# EAGLE board Lab PSU (EAGLE 6.5.0)
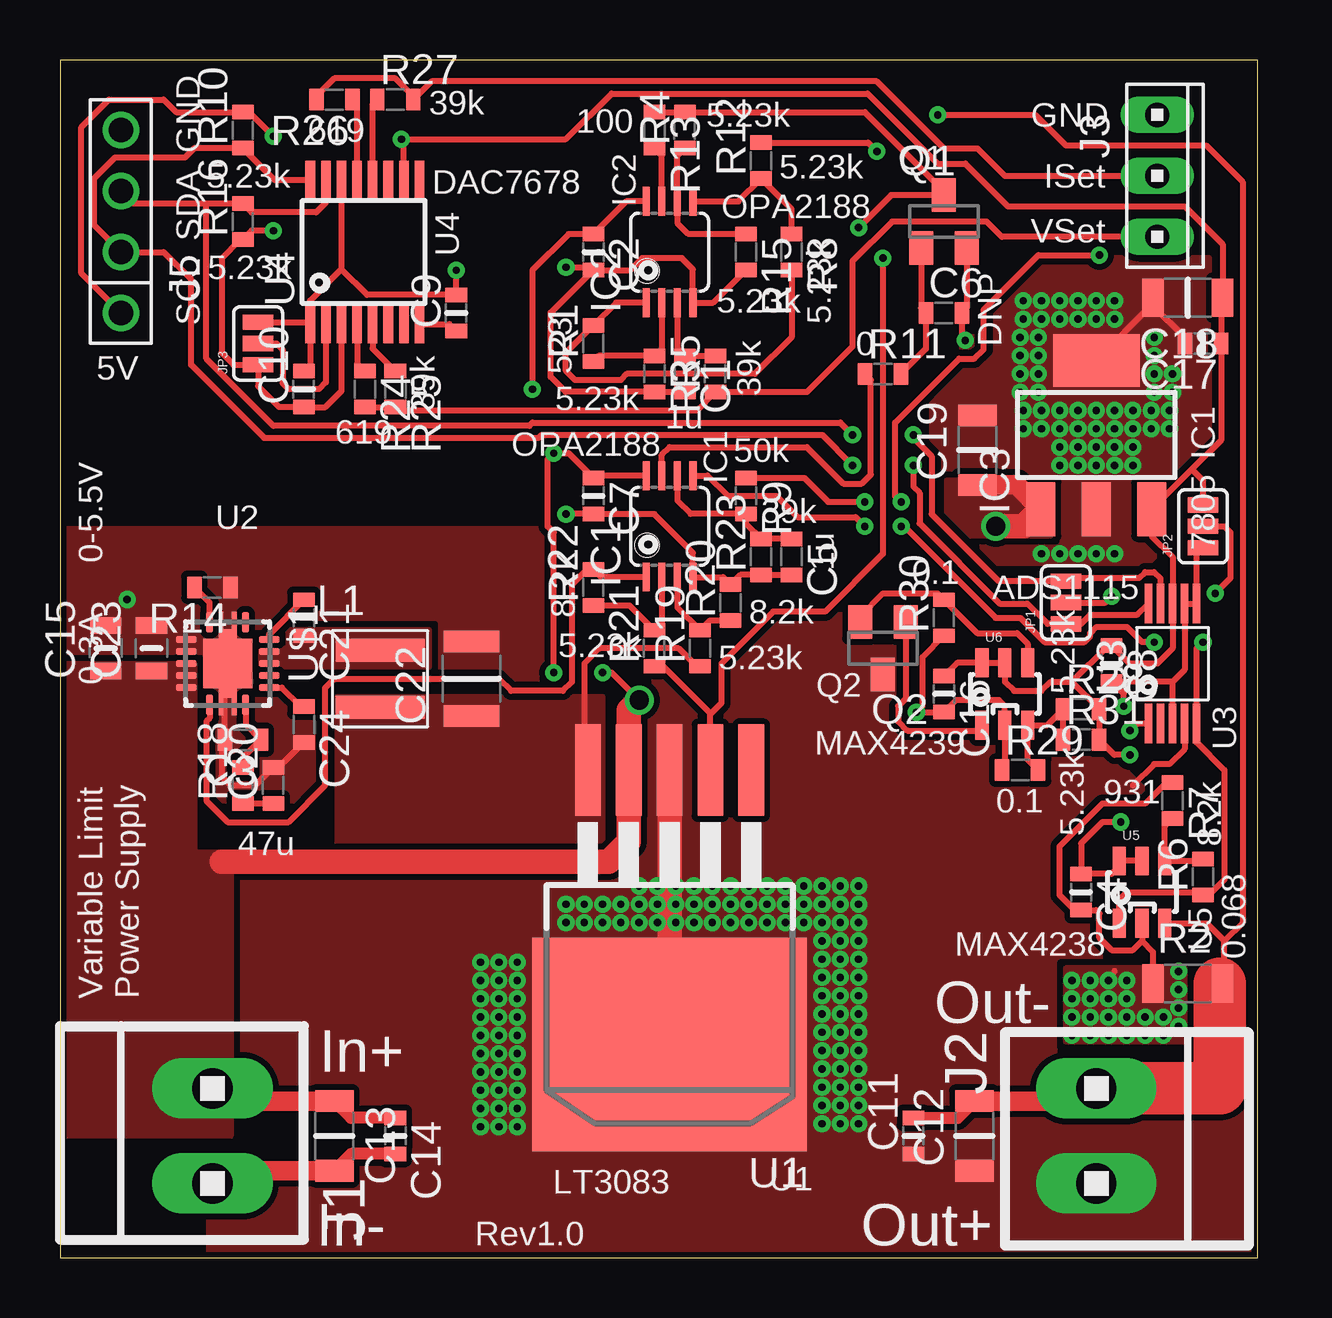
[diagram p0: board, top side]
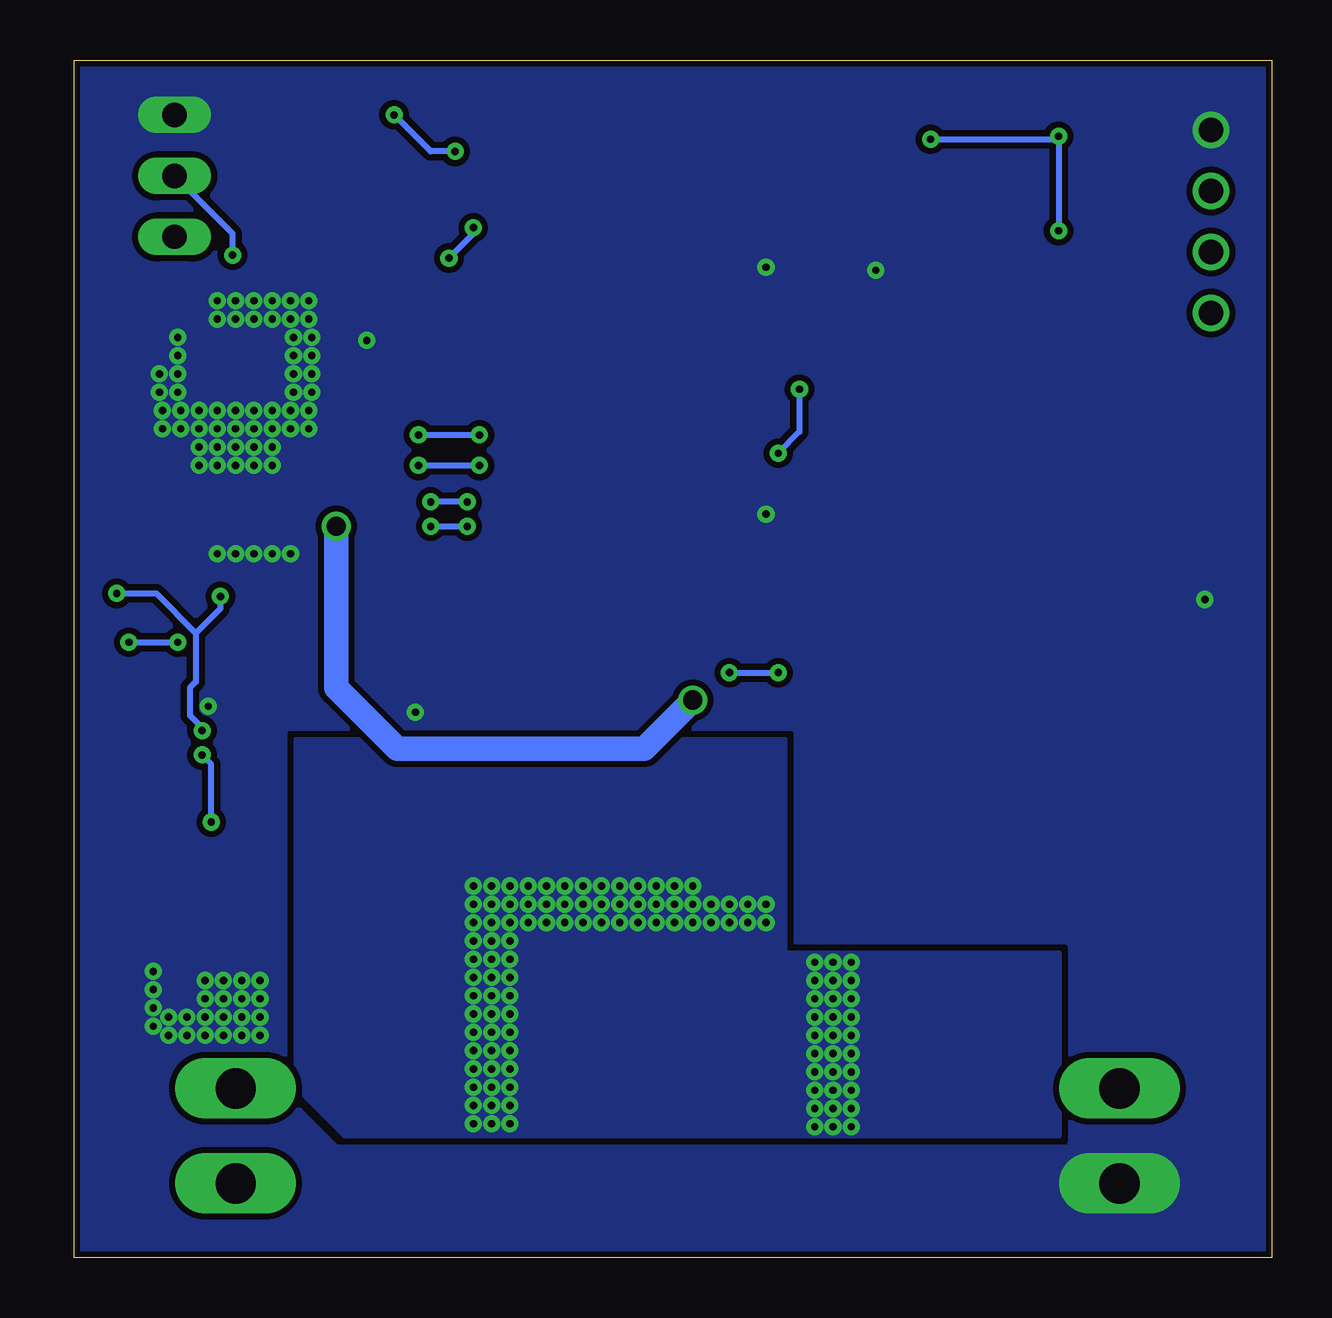
[diagram p1: board, bottom side, seen from below]

Size 49.91 x 49.91 mm. Coordinates in mm from the lower left corner, seen from the top.
Outline: 0,0 49.91,0 49.91,49.91 0,49.91 0,0
Copper layers (1*16): Top 0.035mm / dielectric 1.5mm / Bottom 0.035mm
Design rules "default *": minimum track width 10mil, minimum drill 12mil, track to track 8mil, track to pad 8mil, pad to pad 8mil, via to via 8mil, smd to smd 8mil, copper to edge 10mil, drill to drill 8mil, minimum pad ring 10mil, minimum via ring 8mil, stop-mask expansion 2mil, vias tented up to drill 13mil, thermal gap 10mil
tRestrict: 4 lines

## Footprints (pad centres in the part's own frame; a part is rotated, then mirrored left to right if it is on the bottom)
C0603 = smd 0.6 x 0.9: 1 -0.75,0; 2 0.75,0
C1206 = smd 0.9 x 1.6: 1 -1.45,0; 2 1.45,0
C0805 = smd 0.7 x 1.3: 1 -0.95,0; 2 0.95,0
C1210 = smd 0.9 x 2.3: 1 -1.55,0; 2 1.55,0
MSOP08 = smd 0.3 x 1.2: 1 -0.976,-2.113; 2 -0.326,-2.113; 3 0.324,-2.113; 4 0.974,-2.113; 5 0.974,2.112; 6 0.324,2.112; 7 -0.326,2.112; 8 -0.976,2.112
SOT223 = smd 1.219 x 2.235: 1 -2.311,-3.099; 2 0,-3.099; 3 2.311,-3.099 | smd 3.6 x 2.2: 4 0,3.099
1X2MTA = drill 1.676 long: 1 1.981,0; 2 -1.981,0
10X03MTA = drill 1.016 long: 1 2.54,0; 2 0,0; 3 -2.54,0
10X04MTA = drill 1.016: 1 -3.81,0; 2 -1.27,0; 3 1.27,0; 4 3.81,0
SJ_3 = smd 0.635 x 1.27: 1 -0.889,0; 2 0,0; 3 0.889,0
XAL4000 = smd 3.708 x 0.965: P$1 0,1.181; P$2 0,-1.181
SOT23 = smd 1 x 1.4: 1 -0.95,-1.1; 2 0.95,-1.1; 3 0,1.1
D2PAK-5 = smd 1.067 x 3.81: 1 -3.404,-7.62; 2 -1.702,-7.62; 3 0,-7.62; 4 1.702,-7.62; 5 3.404,-7.62 | smd 11.43 x 8.89: PAD 0,3.81
S-PDSO-G10 = smd 0.296 x 1.65: P$1 -1,-2.5; P$2 -0.5,-2.5; P$3 0,-2.5; P$4 0.5,-2.5; P$5 1,-2.5; P$6 1,2.5; P$7 0.5,2.5; P$8 0,2.5; P$9 -0.5,2.5; P$10 -1,2.5
R-PDSO-G16 = smd 0.4 x 1.6: 1 -2.275,-3; 2 -1.625,-3; 3 -0.975,-3; 4 -0.325,-3; 5 0.325,-3; 6 0.975,-3; 7 1.625,-3; 8 2.275,-3; 9 1.625,3; 10 2.275,3; 11 0.975,3; 12 0.325,3; 13 -0.325,3; 14 -0.975,3; 15 -1.625,3; 16 -2.275,3
SOT23-6 = smd 0.55 x 1.2: 1 -0.95,-1.3; 2 0,-1.3; 3 0.95,-1.3; 4 0.95,1.3; 5 0,1.3; 6 -0.95,1.3
S-PVQFN-N14 = smd 0.85 x 0.28: 1 -1.725,-0.75; 7 1.725,-0.75; 8 1.725,0.75; 14 -1.725,0.75 | smd 0.28 x 0.85: 2 -1,-1.725; 3 -0.5,-1.725; 4 0,-1.725; 5 0.5,-1.725; 6 1,-1.725; 9 1,1.725; 10 0.5,1.725; 11 0,1.725; 12 -0.5,1.725; 13 -1,1.725 | smd 2.05 x 2.05: PP 0,0 | smd 4.3 x 0.2: PP@1 0,0.275; PP@2 0,-0.275 | smd 2.85 x 0.75: PP@3 0,0

## Placement (x,y rotation side)
C1  1u  [C0603]  26.04,36.83 270 top
C2  0.1u  [C0603]  22.23,41.91 270 top
C3  2.69n  [C0603]  7.62,21.59 180 top
C4  0.1u  [C0603]  42.55,15.24 270 top
C5  1u  [C0603]  30.48,29.21 270 top
C6  0  [C0603]  36.83,39.37 0 top
C7  0.1u  [C0603]  22.23,31.75 270 top
C8  0.1u  [C0603]  43.81,24.77 270 top
C9  0.1u  [C0603]  16.51,39.37 90 top
C10  0.1u  [C0603]  10.16,36.2 90 top
C11  1u  [C0603]  35.56,5.08 90 top
C12  10u  [C1206]  38.1,5.08 90 top
C13  10u  [C1206]  11.43,5.08 270 top
C14  1u  [C0603]  13.97,5.08 270 top
C15  4.7u  [C0805]  1.91,25.4 90 top
C16  0.1u  [C0603]  36.83,23.5 270 top
C17  1u  [C0603]  47.62,38.1 180 top
C18  10u  [C1206]  46.99,40.01 180 top
C19  10u  [C1206]  38.23,33.66 90 top
C20  26.5n  [C0603]  8.89,19.68 90 top
C21  0.1u  [C0603]  10.16,26.67 270 top
C22  47u  [C1210]  17.14,24.13 90 top
C23  4.7u  [C0805]  3.81,25.4 90 top
C24  26.5n  [C0603]  10.16,22.23 270 top
IC1  OPA2333DGK  [MSOP08]  25.4,30.48 0 top
IC2  OPA2333DGK  [MSOP08]  25.4,41.91 0 top
IC3  [SOT223]  43.18,34.29 0 top
J1  [1X2MTA]  6.35,5.08 90 top
J2  [1X2MTA]  43.18,5.08 270 top
J3  [10X03MTA]  45.72,45.09 270 top
J5  [10X04MTA]  2.54,43.18 90 top
JP1  JUMPER-3SMD  [SJ_3]  41.91,27.3 90 top
JP2  JUMPER-3SMD  [SJ_3]  47.62,30.48 90 top
JP3  JUMPER-3SMD  [SJ_3]  8.26,38.1 90 top
L1  8.2u  [XAL4000]  13.34,24.13 0 top
Q1  BSS123  [SOT23]  36.83,43.18 0 top
Q2  BSS123  [SOT23]  34.29,25.4 180 top
R1  523  [C0603]  22.23,38.1 90 top
R2  8.3m  [C1206]  46.99,11.43 0 top
R3  5.23k  [C0603]  24.77,36.83 270 top
R4  5.23k  [C0603]  26.04,46.99 90 top
R5  39k  [C0603]  27.3,36.83 90 top
R6  52.3k  [C0603]  47.62,15.88 90 top
R7  659  [C0603]  46.35,19.05 270 top
R8  5.23k  [C0603]  30.48,41.91 270 top
R9  50k  [C0603]  28.57,31.75 270 top
R10  5.23k  [C0603]  7.62,46.99 90 top
R11  0  [C0603]  34.29,36.83 0 top
R12  5.23k  [C0603]  29.21,45.72 90 top
R13  100  [C0603]  24.77,46.99 270 top
R14  200k  [C0603]  6.35,27.94 180 top
R15  5.23k  [C0603]  28.57,41.91 270 top
R16  5.23k  [C0603]  7.62,43.18 90 top
R18  473.25  [C0603]  7.62,19.68 90 top
R19  5.23k  [C0603]  26.67,25.4 90 top
R20  8.2k  [C0603]  27.94,27.3 90 top
R21  5.23k  [C0603]  24.77,25.4 90 top
R22  8.2k  [C0603]  22.23,27.94 90 top
R23  39k  [C0603]  29.21,29.21 90 top
R24  619  [C0603]  12.7,36.2 270 top
R25  39k  [C0603]  13.97,36.2 270 top
R26  619  [C0603]  11.43,48.26 180 top
R27  39k  [C0603]  13.97,48.26 0 top
R28  5.23k  [C0603]  42.55,22.86 0 top
R29  0.1  [C0603]  40.01,20.32 0 top
R30  0.1  [C0603]  36.83,26.67 90 top
R31  5.23k  [C0603]  42.55,21.59 0 top
U1  LT3083-Q  [D2PAK-5]  25.4,12.7 180 top
U3  ADS1115  [S-PDSO-G10]  46.35,24.77 0 top
U4  DAC7678  [R-PDSO-G16]  12.7,41.91 0 top
U5  MAX4238  [SOT23-6]  45.09,15.24 0 top
U6  MAX4238  [SOT23-6]  39.37,23.5 0 top
U$1  TPS54320  [S-PVQFN-N14]  6.99,24.77 270 top

## Library data of the parts
C1-C24 IC3 L1 R1-R16 R18-R31 U1 U3-U6 U$1 = GT-IEEE
IC1 IC2 = linear
J1-J3 J5 = con-amp
JP1-JP3 = SparkFun
Q1 Q2 = transistor-small-signal

## Nets
+5V: C4.1 C8.1 C10.1 C16.1 C17.1 C18.1 IC3.3 J5.1 JP2.3 JP3.1 R10.2 R16.1 R28.2 R31.2 U3.P$8 U4.3 U4.9 U5.5 U5.6 U6.5 U6.6
+12V: C2.1 C7.1 C13.1 C14.1 C15.1 C19.1 C23.1 IC1.8 IC2.8 IC3.1 J1.1 U1.4 U$1.4 U$1.5 U$1.6
GND: C1.2 C2.2 C3.2 C4.2 C5.2 C6.2 C7.2 C8.2 C9.2 C10.2 C13.2 C14.2 C15.2 C16.2 C17.2 C18.2 C19.2 C20.2 C22.2 C23.2 C24.2 IC1.4 IC2.4 IC3.2 IC3.4 J1.2 J3.3 J5.4 JP2.1 JP3.3 Q1.2 R2.1 R3.2 R7.1 R14.1 R15.2 R20.2 R23.1 R29.1 R30.1 U3.P$3 U3.P$6 U3.P$7 U4.1 U4.14 U5.2 U6.2 U$1.2 U$1.3 U$1.PP U$1.PP@1 U$1.PP@2 U$1.PP@3
N$1: C11.1 C12.1 J2.1 Q2.3 U1.3 U1.PAD U3.P$4
N$2: C11.2 C12.2 J2.2 R2.2 R12.2 U5.3
N$3: C1.1 IC2.3 R5.2
N$4: R6.2 R7.2 U5.4
N$5: IC1.5 R6.1 U3.P$5 U5.1
N$6: C5.1 IC1.6 R9.2 R23.2
N$7: IC1.7 R11.1
N$8: Q1.3 R4.2 R13.1 R21.1 U1.2
N$9: IC2.2 R1.1 R3.1
N$10: IC2.7 R13.2
N$11: IC2.1 R1.2 R8.2
N$12: C6.1 Q1.1 R11.2
N$13: IC2.5 R8.1 R12.1
N$14: IC2.6 R4.1 R15.1
N$15: C20.1 R18.1
N$16: J3.1 R5.1 R24.2 R25.2
N$17: J3.2 R9.1 R26.2 R27.2
N$18: C3.1 R18.2 U$1.8
N$19: R14.2 U$1.1
N$20: C22.1 L1.P$2 R19.1 U1.5
N$21: IC1.1 R22.2 U$1.7
N$22: IC1.3 R19.2 R20.1
N$23: IC1.2 R21.2 R22.1
N$24: R24.1 U4.4
N$25: R25.1 U4.5
N$26: C9.1 U4.8
N$27: R26.1 U4.13
N$28: Q2.1 U6.1
N$29: R27.1 U4.12
N$30: R28.1 R29.2 R31.1 U6.3
N$31: Q2.2 R30.2 U6.4
N$32: C21.1 U$1.13
N$33: C21.2 L1.P$1 U$1.11 U$1.12
N$34: C24.1 U$1.9
N$35: JP1.2 JP2.2 U3.P$1
N$36: JP3.2 U4.2
SCL: J5.2 JP1.1 R10.1 U3.P$10 U4.16
SDA: J5.3 JP1.3 R16.2 U3.P$9 U4.15

## Tracks (layer width: path | path; a pad name or v marks a point on that pad's centre or on a via)
+5V  (via drill 0.3)
  Top 0.254: v8.89,46.74 7.89,47.74 R10.2 4.84,47.74 4.32,48.26 2.03,48.26 0.89,47.12 0.89,41.02 J5.1 | v8.89,42.8 7.99,42.8 R16.1 7.49,42.42 6.73,41.66 6.73,37.72 7.24,37.21 JP3.1 8.26,36.32 9.13,35.45 C10.1 11.06,35.45 11.18,35.56 11.72,36.11 U4.3 | U4.9 14.32,46.51 v14.22,46.61 21.08,46.61 22.99,48.51 33.66,48.51 36.58,45.59 37.72,45.59 39.5,43.81 46.86,43.81 48.44,42.24 C18.1 48.38,39.94 C17.1 48.38,34.08 47.16,32.85 | v44.2,18.16 43.43,18.16 42.55,17.27 C4.1 42.56,16 43.81,16 44.13,16.32 U5.6 U5.5 | 47.16,32.85 IC3.3 45.49,30.07 46.35,29.21 U3.P$8 46.35,25.4 45.72,24.77 44.56,24.77 C8.1 43.68,25.52 42.16,24 | C16.1 37.38,24.8 U6.6 U6.5 39.37,24 39.75,23.62 40.89,23.62 41.27,24 42.16,24 | 42.16,24 43.3,22.87 R28.2 R31.2 43.93,20.95 v44.58,20.95 | JP2.3 47.62,32.38 47.16,32.85
  Bottom 0.254: v8.89,42.8 v8.89,46.74 9.02,46.61 v14.22,46.61 | v44.2,18.16 44.2,20.57 v44.58,20.95
+12V  (via drill 0.3, 0.8)
  Top 0.254: IC1.8 22.32,32.59 C7.1 | IC2.8 23.59,44.02 C2.1 21.2,42.66 19.68,41.15 v19.68,36.2 | 22.21,32.51 C7.1 | v20.57,24.38 20.57,30.23 20.32,30.48 20.32,33.27 v20.57,33.53 21.2,33.53 C7.1 | v22.61,24.38 22.99,24.38 v24.13,23.24
  Top 0.508: C14.1 12.13,5.83 C13.1
  Top 0.813: C13.1 6.88,6.53 J1.1 | C19.1 39.85,32.2 IC3.1
  Top 1.016: v24.13,23.24 23.7,22.81 U1.4 23.7,17.35 22.86,16.51 6.73,16.51 | IC3.1 40.16,30.48 v38.99,30.48
  Bottom 0.254: v20.57,33.53 19.68,34.42 v19.68,36.2 | v22.61,24.38 v20.57,24.38
  Bottom 1.016: v38.99,30.48 38.99,23.75 36.45,21.21 26.16,21.21 v24.13,23.24
  pour Top (no thermals): 0,24.77 5.59,24.77 5.59,16.89 7.11,16.89 7.11,5.08 0,5.08
  pour Top (isolate 0.254, no thermals): 36.96,32.38 36.96,30.1 41.27,30.1 41.27,32.13 39.75,32.13 39.75,32.38
GND  (via drill 0.3)
  Top 0.254: C1.2 R3.2 21.07,36.08 20.45,36.7 20.45,39.38 C2.2 | C10.2 10.43,37.21 U4.1 10.43,38.99 | U4.14 11.72,41.19 | 11.72,41.19 12.79,40.12 C9.2 v16.51,41.15 | R15.2 27.21,39.8 IC2.4 26.37,41.19 25.91,41.66 24.26,41.66 23.76,41.16 C2.2 | Q1.2 37.78,39.57 C6.2 37.58,38.37 v37.72,38.23 | C2.2 22.11,41.27 v21.08,41.27 | v21.08,30.99 21.09,31 C7.2 22.24,30.99 24.77,30.99 26.37,29.38 IC1.4 27.63,28.37 R20.2 28.34,28.46 R23.1 C5.2 | 43.93,11.95 43.94,11.94 | U5.2 45.09,13.21 | R7.1 46.09,19.8 45.21,18.92 43.43,18.92 41.66,17.14 41.66,15.11 42.28,14.49 C4.2 43.17,14.49 43.31,14.35 43.31,13.34 43.81,12.83 44.7,12.83 45.09,13.21 | 45.09,13.21 45.54,12.75 R2.1 | 45.54,39.75 C18.2 45.54,39.75 | 45.54,39.75 45.54,39.68 | 45.54,39.68 46.88,38.34 C17.2 | IC3.4 45.54,39.75 | 45.54,39.75 45.54,39.68 | 45.54,39.68 45.54,39.75 | R29.1 39.37,20.43 U6.2 39.37,22.99 39.12,23.24 37.33,23.24 C16.2 36.82,22.73 v35.69,22.73 35.94,22.99 35.94,25.03 R30.1 | v44.32,22.99 44.32,23.51 C8.2 43.83,24 46.35,24 | C24.2 9.12,20.43 C20.2 8.88,20.43 8.13,19.68 7.11,19.68 6.73,20.07 6.73,21.45 C3.2 6.87,24.65 U$1.PP@3 | 10.43,38.99 10.43,39.89 11.72,41.19 | JP3.3 10.43,38.99 | U3.P$3 46.35,24 | 46.35,24 46.85,24.5 U3.P$7 U3.P$6 47.35,29.32 JP2.1
  Top 0.508: C14.2 12.13,4.33 C13.2
  Top 0.813: C13.2 6.88,3.63 J1.2
  other vias: 46.61,11.94 46.61,11.18 46.61,10.41 46.61,9.65 45.97,10.03 45.97,9.27 45.21,9.27 45.21,10.03 44.45,10.79 44.45,11.56 43.69,11.56 43.69,10.79 44.45,10.03 44.45,9.27 43.69,9.27 43.69,10.03 42.93,10.03 42.93,9.27 42.16,9.27 42.16,10.03 42.16,10.79 42.93,10.79 42.93,11.56 42.16,11.56 40.89,39.12 40.77,38.35 40.77,37.59 40.77,36.83 40.77,36.07 41.66,39.12 42.42,39.12 43.18,39.12 43.94,39.12 45.59,38.35 45.59,37.59 45.59,36.83 45.59,36.07 45.47,35.31 44.7,35.31 43.94,34.54 43.94,35.31 43.18,35.31 42.42,35.31 41.66,35.31 40.89,35.31 44.7,34.54 45.47,34.54 46.23,34.54 46.23,35.31 46.35,36.07 46.35,36.83 43.18,34.54 42.42,34.54 41.66,34.54 40.89,34.54 40.13,35.31 40.13,34.54 40.01,36.07 40.01,36.83 40.01,37.59 40.01,38.35 40.13,39.12 40.13,39.88 40.89,39.88 41.66,39.88 42.42,39.88 43.18,39.88 43.94,39.88 43.18,29.34 42.42,29.34 43.94,29.34 43.18,33.02 42.42,33.02 43.94,33.02 41.66,29.34 41.66,33.02 44.7,33.02 43.18,33.78 43.94,33.78 44.7,33.78 42.42,33.78 41.66,33.78 40.89,29.34 2.79,27.43
  pour Top (isolate 0.254, no thermals): 46.86,12.06 41.91,12.06 41.91,9.02 46.86,9.02
  pour Bottom (isolate 0.254, rank 2, no thermals): 0,0 50,0 50,50 0,50
  pour Top (isolate 0.254, rank 2, no thermals): 41.27,41.66 36.32,36.7 36.32,31.5 38.99,28.96 45.34,28.96 47.88,31.5 47.88,41.66
  pour Top (isolate 0.254, rank 2, no thermals): 0,18.29 20.19,18.29 20.19,30.35 0,30.35
N$1  (via drill 0.3)
  Top 0.254: 44.7,19.68 45.59,20.57 46.23,20.57 46.85,21.2 U3.P$4
  Top 1.016: U1.3 25.4,12.06
  other vias: 19.05,12.32 19.05,11.56 19.05,10.79 19.05,10.03 19.05,9.27 19.05,7.75 19.05,8.51 19.05,6.99 19.05,6.22 19.05,5.46 18.29,5.46 18.29,6.22 18.29,6.99 18.29,7.75 18.29,8.51 18.29,9.27 18.29,10.03 18.29,10.79 18.29,11.56 18.29,12.32 31.75,5.59 32.51,5.59 32.51,6.35 31.75,6.35 31.75,7.11 32.51,7.11 32.51,7.87 31.75,7.87 31.75,8.64 32.51,8.64 32.51,9.4 31.75,9.4 31.75,10.16 32.51,10.16 32.51,10.92 31.75,10.92 31.75,11.68 32.51,11.68 32.51,12.45 31.75,12.45 31.75,13.21 32.51,13.21 17.53,5.46 17.53,6.22 17.53,6.99 17.53,7.75 17.53,8.51 17.53,9.27 17.53,10.03 17.53,10.79 17.53,11.56 17.53,12.32 33.27,13.21 33.27,12.45 33.27,11.68 33.27,10.92 33.27,10.16 33.27,9.4 33.27,8.64 33.27,7.87 33.27,7.11 33.27,6.35 33.27,5.59 31.75,13.97 32.51,13.97 33.27,13.97 30.99,13.97 30.23,13.97 29.46,13.97 28.7,13.97 27.94,13.97 27.18,13.97 26.42,13.97 25.65,13.97 24.89,13.97 24.13,13.97 23.37,13.97 22.61,13.97 21.84,13.97 21.08,13.97 21.08,14.73 21.84,14.73 22.61,14.73 23.37,14.73 24.13,14.73 24.89,14.73 25.65,14.73 26.42,14.73 27.18,14.73 27.94,14.73 28.7,14.73 29.46,14.73 30.23,14.73 30.99,14.73 31.75,14.73 32.51,14.73 33.27,14.73 24.13,15.49 24.89,15.49 25.65,15.49 26.42,15.49 27.18,15.49 27.94,15.49 28.7,15.49 29.46,15.49 30.23,15.49 30.99,15.49 31.75,15.49 32.51,15.49 33.27,15.49
  pour Top (isolate 0.254, rank 5, no thermals): 6.22,27.81 36.96,27.81 49.91,14.73 49.91,0 6.22,0
  pour Bottom (isolate 0.254, no thermals): 8.89,5.08 38.61,5.08 40.64,7.11 40.64,21.59 20.32,21.59 20.32,12.7 8.89,12.7
N$2  (via drill 0.3)
  Top 0.254: 48.31,11.43 R2.2 48.51,11.5 48.51,13.21 | v36.58,47.62 40.64,47.62 41.91,46.35 47.75,46.35 49.28,44.83 49.28,13.97 48.51,13.21 | R12.2 33.67,46.47 v34.04,46.1 | U5.3 47.78,13.94 48.51,13.21
  Top 0.508: C11.2 37.4,5.83 C12.2
  Top 0.813: C12.2 43.92,6.53 J2.2
  Top 2.184: 48.31,11.43 48.31,7.06 J2.2
  Bottom 0.254: v34.04,46.1 35.05,46.1 v36.58,47.62
N$3
  Top 0.254: IC2.3 25.72,37.89 C1.1 R5.2
N$4
  Top 0.254: R6.2 47.54,16.54 U5.4 46.03,17.98 R7.2
N$5  (via drill 0.3)
  Top 0.254: IC1.5 26.97,32.59 27.81,31.75 29.84,31.75 30.73,30.86 33.15,30.86 v33.53,30.48 | U5.1 44.13,14.93 44.45,15.24 47.51,15.24 R6.1 47.88,15.12 48.51,15.76 48.51,20.32 47.35,21.48 U3.P$5 47.35,25.38 v47.62,25.65 | v45.59,25.65 45.09,25.65 44.45,26.29 43.18,26.29 42.93,26.04 42.93,25.91 42.67,25.65 41.02,25.65 40.01,26.67 38.99,26.67 35.18,30.48 v35.05,30.48
  Bottom 0.254: v47.62,25.65 v45.59,25.65 | v35.05,30.48 v33.53,30.48
N$6
  Top 0.254: C5.1 R23.2 28.57,30.59 R9.2 26.28,31 25.72,31.55 IC1.6
N$7
  Top 0.254: IC1.7 25.07,33.46 25.4,33.78 31.11,33.78 32.64,32.26 33.4,32.26 33.78,32.64 33.78,36.59 R11.1
N$8  (via drill 0.3)
  Top 0.254: U1.2 27.1,22.68 | R21.1 25.13,24.65 27.1,22.68 | R13.1 R4.2 33.54,47.74 36.83,44.45 Q1.3 34.63,44.28 v33.27,42.93 | v34.29,41.66 34.29,29.34 31.88,26.92 29.72,26.92 27.56,24.77 27.56,23.11 27.13,22.68 27.1,22.68
  Bottom 0.254: v33.27,42.93 33.27,42.67 v34.29,41.66
N$9
  Top 0.254: IC2.2 25.07,37.89 R3.1 22.45,37.58 R1.1
N$10
  Top 0.254: IC2.7 25.07,45.93 R13.2
N$11
  Top 0.254: IC2.1 23.17,39.8 R1.2 21.08,37.71 21.08,36.96 21.46,36.58 23.37,36.58 23.62,36.83 28.96,36.83 30.48,38.35 R8.2
N$12
  Top 0.254: Q1.1 35.88,39.57 C6.1 36.08,37.87 R11.2
N$13
  Top 0.254: IC2.5 28.26,44.02 R12.1 30.48,43.7 R8.1
N$14
  Top 0.254: R4.1 25.72,45.93 IC2.6 25.72,43.11 26.16,42.67 28.56,42.67 R15.1
N$15
  Top 0.254: R18.1 C20.1
N$16
  Top 0.254: R24.2 R25.2 14.11,35.31 26.53,35.31 R5.1 31.13,36.08 33.02,37.97 33.02,41.53 34.67,43.18 38.61,43.18 39.24,42.55 J3.1
N$17  (via drill 0.3)
  Top 0.254: R26.2 10.68,48.4 11.43,49.15 13.97,49.15 14.72,48.4 R27.2 15.48,49.02 34.04,49.02 36.83,46.23 38.23,46.23 39.37,45.09 J3.2 | R9.1 31,32.5 32,31.5 v33.53,31.5 | v35.05,31.5 34.8,31.75 34.8,34.8 37.47,37.47 38.1,37.47 38.48,37.85 38.48,39.5 40.77,41.78 v43.31,41.78
  Bottom 0.254: v33.53,31.5 v35.05,31.5 | v43.31,41.78 43.31,42.67 J3.2
N$18
  Top 0.254: U$1.8 7.74,22.23 C3.1 7.62,20.84 R18.2
N$19
  Top 0.254: U$1.1 6.24,27.3 R14.2
N$20
  Top 0.254: R19.1 26.53,24.65 25.78,25.4 22.48,25.4 21.84,24.77 21.84,21.34 | 21.97,20.34 U1.5
  pour Top (isolate 0.254, no thermals): 22.61,23.37 11.56,23.37 11.56,17.27 22.61,17.27
N$21
  Top 0.254: IC1.1 22.55,28.37 R22.2 21.96,28.69 21.34,28.07 21.34,24 20.95,23.62 18.8,23.62 18.29,24.13 11.43,24.13 11.05,23.75 11.05,19.68 9.53,18.16 6.99,18.16 6.1,19.05 6.1,22.35 6.24,22.49 U$1.7
N$22
  Top 0.254: IC1.3 25.72,27.1 R19.2 27.07,26.55 R20.1
N$23
  Top 0.254: R22.1 23.73,27.19 R21.2 25.07,26.46 IC1.2
N$24
  Top 0.254: U4.4 12.38,37.27 R24.1
N$25
  Top 0.254: U4.5 13.03,37.9 13.03,37.89 R25.1
N$26
  Top 0.254: U4.8 16.22,38.91 C9.1
N$27
  Top 0.254: U4.13 12.38,48.06 R26.1
N$28
  Top 0.254: Q2.1 35.24,23.3 34.92,22.99 34.92,22.35 35.31,21.97 38.2,21.97 U6.1
N$29
  Top 0.254: U4.12 13.03,48.06 R27.1
N$30
  Top 0.254: R29.2 40.32,20.75 U6.3 41.13,22.2 R28.1 R31.1
N$31
  Top 0.254: Q2.2 33.34,26.74 34.29,27.69 36.56,27.69 R30.2 38.22,26.04 39.88,26.04 40.32,25.59 U6.4
N$32
  Top 0.254: U$1.13 8.71,25.97 C21.1
N$33
  pour Top (isolate 0.254, no thermals): 8.38,25.4 9.53,25.4 9.53,26.16 15.37,26.16 15.37,24.64 8.38,24.64
N$34
  Top 0.254: U$1.9 9.24,23.77 10.03,22.98 C24.1
N$35  (via drill 0.3)
  Top 0.254: U3.P$1 44.87,22.27 v44.58,21.97 | JP2.2 48.51,30.48 48.77,30.23 48.77,28.32 v48.13,27.69 | JP1.2 43.56,27.3 v43.81,27.56
  Bottom 0.254: v44.58,21.97 44.58,22.1 45.09,22.61 45.09,23.75 44.83,24 44.83,26.04 | v48.13,27.69 46.48,27.69 44.83,26.04 | v43.81,27.56 43.81,27.05 44.83,26.04
N$36
  Top 0.254: U4.2 11.07,36.48 10.79,36.2 9.53,36.2 9.27,36.45 9.27,37.85 9.02,38.1 JP3.2
SCL  (via drill 0.3)
  Top 0.254: U4.16 8.95,44.91 R10.1 5.6,46.24 5.21,45.85 2.29,45.85 1.4,44.96 1.4,43.05 J5.2 4.32,41.91 5.46,40.77 5.46,37.21 8.51,34.16 19.94,34.16 20.07,34.29 31.75,34.29 v33.02,33.02 | v35.56,33.02 35.56,32.13 35.81,31.88 35.81,30.61 39.16,27.27 40.3,27.27 41.02,26.54 41.15,26.42 JP1.1 42.55,26.42 42.93,26.8 44.89,26.8 U3.P$10
  Bottom 0.254: v35.56,33.02 v33.02,33.02
SDA  (via drill 0.3)
  Top 0.254: U4.15 11.07,43.97 10.67,43.56 7.99,43.56 R16.2 6.1,43.93 | 6.1,43.93 6.1,37.47 8.89,34.67 19.56,34.67 19.68,34.8 32.51,34.8 v33.02,34.29 | 6.1,43.93 3.06,43.93 J5.3 | U3.P$9 45.85,28.31 45.59,28.57 45.21,28.57 44.96,28.32 42.04,28.32 JP1.3 39.12,28.19 36.32,30.99 36.32,33.4 35.56,34.16 v35.56,34.29
  Bottom 0.254: v35.56,34.29 v33.02,34.29

## Text on the board
_tsilk: GND | 39k | 100 | GND | 619 | 5.23k | ISet | SDA | 5.23k | 5.23k | Q1 | DAC7678 | U4 | IC2 | OPA2188 | VSet | SCL | 5.23k | 5.23k | 5.23k | 5V | 39k | 39k | 0 | DNP | 523 | 5.23k | 1u | 619 | OPA2188 | 50k | 7805 | IC1 | IC1 | 39k | U2 | 1u | 0-5.5V | 0.1 | ADS1115 | 8.2k | 5.23k | 8.2k | 5.23k | 0-3A | Q2 | 5.23k | U3 | MAX4239 | 5.23k | 0.1 | 931 | 47u | 8.2k | U5 | MAX4238 | 0.068 | Variable Limit / Power Supply | Out- | In+ | LT3083 | U1 | In- | Rev1.0 | Out+